# Altium PCB dianyuan.PcbDoc
Units mil, origin at the board's own origin, x right, y up, seen from the top; angles counter-clockwise.
Board outline 3150 x 1970 mil, 2 copper layers (Top Layer, Bottom Layer); 51 components, 21 nets, 149 pads, 228 vias.
Unrouted connection lines stored in the file: 34.
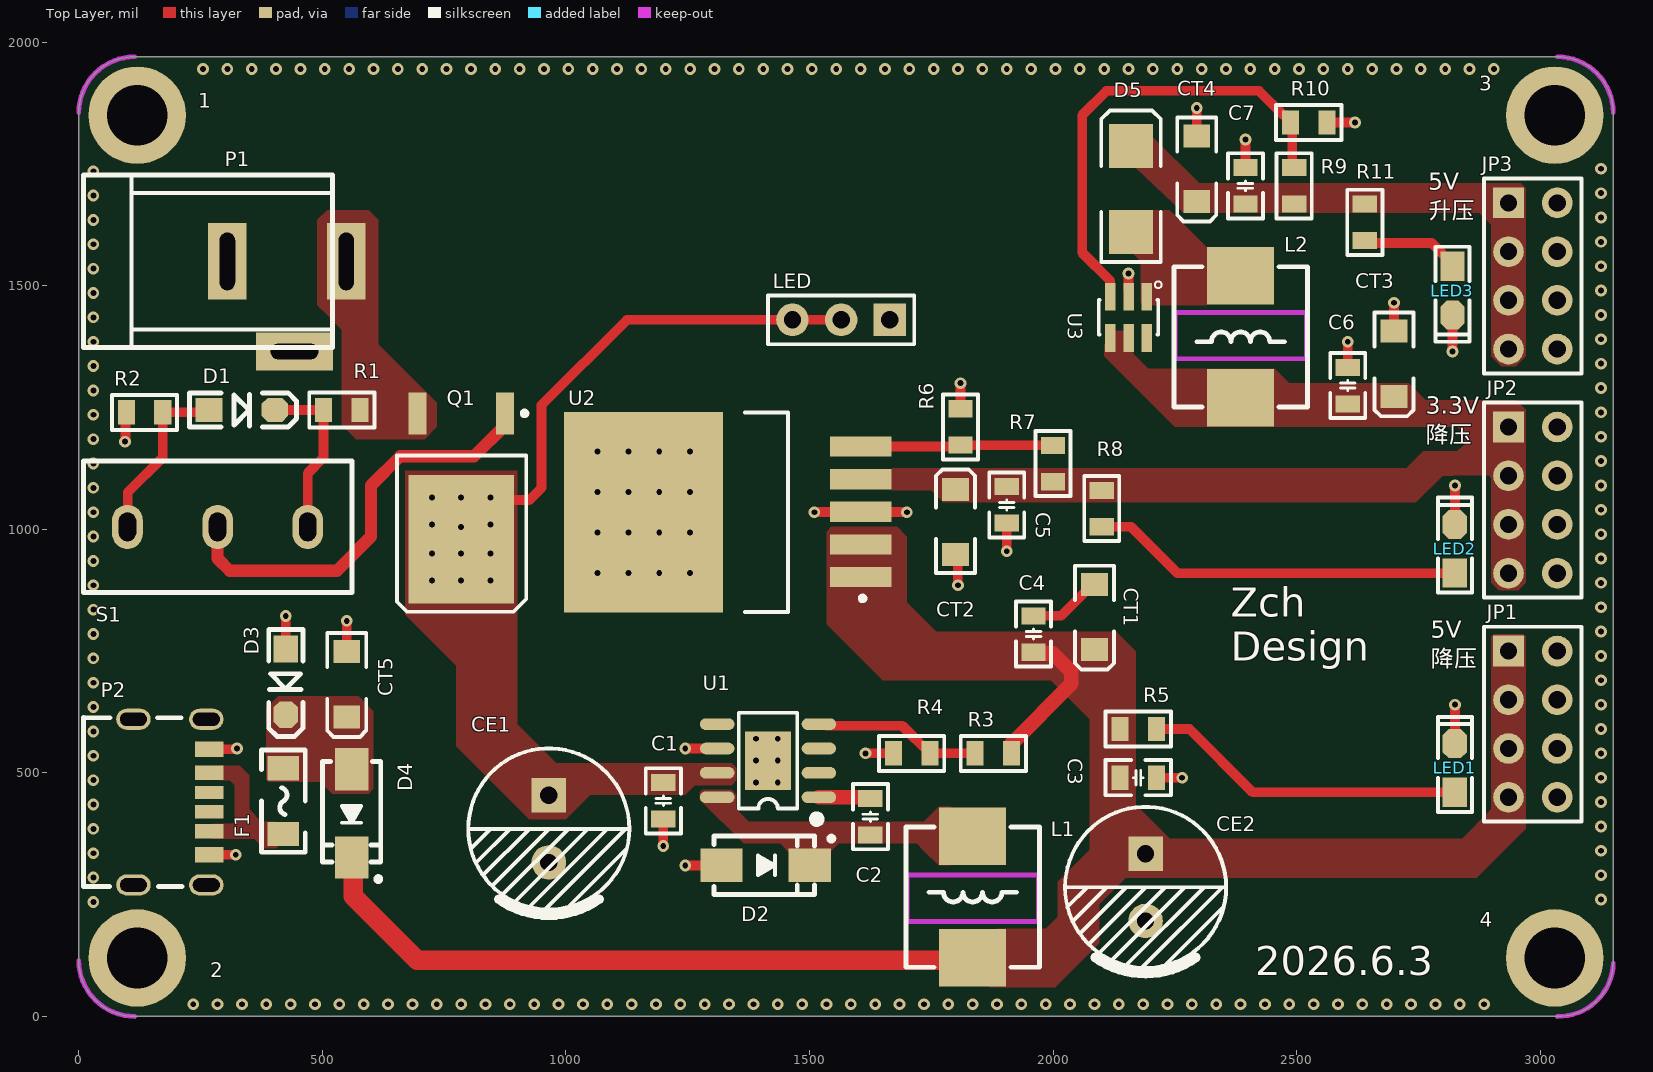
[diagram p0: Top Layer view]
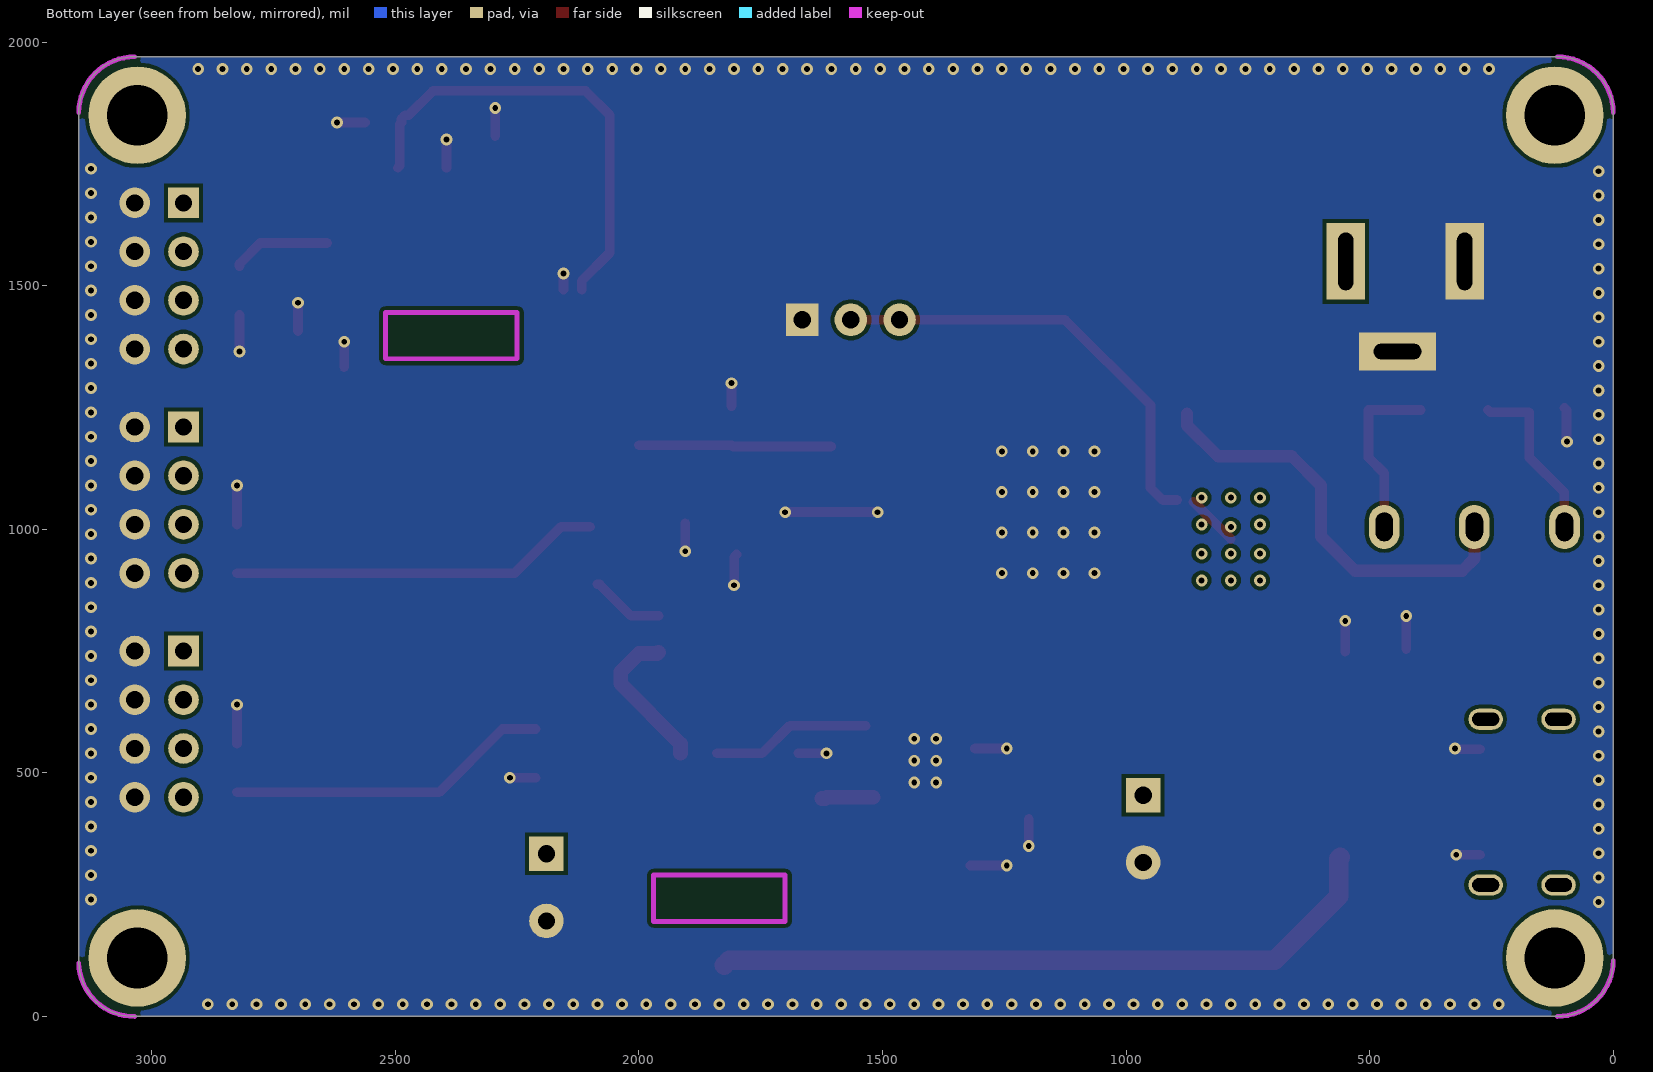
[diagram p1: Bottom Layer view, seen from below]

## Layer stack, top to bottom
Top Solder: solder mask 0.4, Solder Resist, Dk 3.5
Top Layer: signal copper 1.4
Dielectric 1: dielectric 12.6, FR-4, Dk 4.8
Bottom Layer: signal copper 1.4
Bottom Solder: solder mask 0.4, Solder Resist, Dk 3.5

## Board outline
115,0 cw(c115,115) 0,115 0,1855 cw(c115,1855) 115,1970 115,1969.67 3035,1969.67 3035,1970 cw(c3035,1855) 3150,1855 3150,110 cw(c3037.5,112.5) 3035,0
cut-out: -1000,-2967.33 -990,-2967.33 -990,-2957.33 -1000,-2957.33

## Design rules (kind name [scope] priority, off if disabled: settings)
Clearance Clearance_1 [All] p1: gap=8 ignorepadtopadclearanceinfootprint=FALSE except(12: Via-Via)
HoleSize [All] p1: absolutevalues=TRUE maxlimit=200 minlimit=12 maxpercent=80.000 minpercent=20.000
HoleToHoleClearance [All] p1: gap=6 allowstackedmicrovias=TRUE
MinimumSolderMaskSliver MinimumSolderMaskSliver-USB-C [InComponent('P2')] p1: minsoldermaskwidth=2
MinimumSolderMaskSliver [InComponent('U3')] p2: minsoldermaskwidth=4
MinimumSolderMaskSliver MinimumSolderMaskSliver_1 [All] p3: minsoldermaskwidth=10
NetAntennae [All] p1: netantennaetolerance=6
PlaneConnect [All] p1: planeconnectstyle=Direct reliefexpansion=20 reliefentries=4 reliefconductorwidth=10 reliefairgap=10
PolygonConnect [All] p1: connectstyle=Direct reliefconductorwidth=16 reliefentries=4 polygonreliefangle="90 Angle" airgapwidth=10
RoutingVias [All] p1: holewidth=12 width=24 viastyle="Through Hole" minholewidth=12 minwidth=24 maxholewidth=20 maxwidth=40
SilkToSilkClearance [All] p1: silktosilkclearance=6
SilkToSolderMaskClearance SilkToSolderMaskClearance_usb_c [InComponent('P2')] p1: minsilkscreentomaskgap=5 clearancetoexposedcopper=TRUE
SilkToSolderMaskClearance [IsPad] p2: minsilkscreentomaskgap=4 clearancetoexposedcopper=TRUE
SolderMaskExpansion [All] p1: expansion=4 istentingtop=FALSE
Width [All] p1: maxlimit=50 minlimit=10 preferedwidth=20 toplayer_minwidth=20 bottomlayer_maxwidth=10 bottomlayer_prefwidth=10 minimp=50.000000 maximp=50.000000 favimp=50.000000
23 further rules are at their usual default settings.

## Components (designator, comment, footprint, x,y, rotation, side; value= is the part's Value field where it differs from the comment)
1 "M3" "M3 125X200" 120,1850 r90 top
2 "M3" "M3 125X200" 120,120 r90 top
3 "M3" "M3 125X200" 3030,1850 r90 top
4 "M3" "M3 125X200" 3030,120 r90 top
C1 "100nF" "C 0805_L" 1200,442.6 r270 top
C2 "10nF" "C 0805_L" 1625,410 r270 top
C3 "100nF" "C 0805_L" 2175,490 r180 top
C4 "100nF" "C 0805_L" 1960,785 r270 top
C5 "100nF" "C 0805_L" 1905,1050 r90 top
C6 "100nF" "C 0805_L" 2605,1295 r270 top
C7 "100nF" "C 0805_L" 2395,1705 r270 top
CE1 "100uF/16V" "CAP 3.5*8*11.5 - BK" 965,385 r270 top
CE2 "100uF/16V" "CAP 3.5*8*11.5 - BK" 2190,265 r270 top
CT1 "22uF/6.3V" "CD A(3216)" 2085,820 r90 top
CT2 "22uF/6.3V" "CD A(3216)" 1800,1015 r270 top
CT3 "22uF/6.3V" "CD A(3216)" 2700,1340 r90 top
CT4 "22uF/6.3V" "CD A(3216)" 2295,1740 r90 top
CT5 "10uF/6.3V" "CD A(3216)" 550,681.93 r90 top
D1 "BZT52C16" SOD-123 335,1245 r0 top
D2 "SS14" SMA 1410,310 r0 top
D3 "BZT52B5V1" SOD-123 425,686.93 r270 top
D4 "SS14" SMA 560,416.93 r270 top
D5 "SS54" SMB 2160,1698.58 r90 top
F1 "SMD1206-050-16" "FU 1206" 420,441.93 r90 top
JP1 "Header 4X2" HDR2.54-LI-2x4P 2985,600 r270 top
JP2 "Header 4X2" HDR2.54-LI-2x4P 2985,1060 r270 top
JP3 "Header 4X2" HDR2.54-LI-2x4P 2985,1520 r270 top
L1 "22uH" L-SMD-0630 1835,245 r270 top
L2 "4.7uH" L-SMD-0630 2385,1395 r90 top
LED "HDR-1X3" HDR2.54-M-LI-3P 1565,1430 r180 top
LED1 "红色" "LED 0805R" 2825,510 r90 top
LED2 "红色" "LED 0805R" 2825,960 r90 top
LED3 "红色" "LED 0805R" 2820,1490 r270 top
P1 "3.5*1.3" DC-005 305,1550 r180 top
P2 "USB TYPE C 6Pin母座" USB-C-SMD_10P-P1.00-L6.8-W8.9 190,440 r0 top
Q1 "HY19P03D" "TO252 - 3" 785,1064.65 r270 top
R1 "4.7K" "R 0805_L" 540,1245 r180 top
R2 "1K" "R 0805_L" 135,1240 r0 top
R3 "6.8K" "R 0805_L" 1877.4,540 r0 top
R4 "2.2K" "R 0805_L" 1709.8,540 r0 top
R5 "2.2K" "R 0805_L" 2175,590 r180 top
R6 "2K" "R 0805_L" 1810,1210 r270 top
R7 "3.3K" "R 0805_L" 2000,1135 r270 top
R8 "2K" "R 0805_L" 2100,1042.6 r90 top
R9 "110K" "R 0805_L" 2495,1705 r270 top
R10 "15K" "R 0805_L" 2525,1835 r180 top
R11 "2.2K" "R 0805_L" 2640,1630 r90 top
S1 "SS-12F23" SS-12D10 285,1005 r180 top
U1 "TPS5430" SOIC-8_EP 1415,525 r180 top
U2 "SPX29302" TO263-5 1400,1020 r0 top
U3 "MT3608" SOT23-6 2155,1435 r0 top

## Footprints (in the part's own frame and the unit in brackets; to place one, negate y for a bottom-side part, rotate by r counter-clockwise, add the part's x,y. Pads: shape width x height; smd on the part's side, far side on the other; paste and mask are expansions set on the pad)
"C 0805_L" [mil] "无极性贴片电容                                        淘宝ID:黄晶宝石"
  rect 35x50 smd: 1(-37.4,0) 2(37.4,0)
  silkscreen extent -67,-36 67,36, body extent -39,-24 39,24, height 20
"CAP 3.5*8*11.5 - BK" [mm] "脚距3.5mm直径8mm高度11.5mm"
  rect 1.8x1.8 hole 0.9: 1(-1.75,0)
  round 1.8 hole 0.9: 2(1.75,0)
  silkscreen extent -4.2,-4.2 4.5,4.2, body extent -4,-4 4.01,4, height 11.54
"CD A(3216)" [mm] "长3.2mm，宽1.6mm，厚1.6mm      淘宝ID:黄晶宝石"
  rect 1.2x1.4 smd: 1(-1.7,0) 2(1.7,0)
  silkscreen extent -2.74,-1.02 2.67,1.02, body extent -1.6,-0.8 1.6,0.8, height 1.6
DC-005 [mm] "5.5*2.1mm，DC30V,2.5A      淘宝ID:黄晶宝石"
  rect 2x4 hole 0.8 slot 3 at 90 deg: 1(-6.2,0) 2(0,0)
  rect 4x2 hole 0.8 slot 2.5 at 0 deg: 3(-3.5,4.7)
  silkscreen extent -5.48,-4.5 7.5,4.5, body extent -6.55,-4.5 7.5,4.8, height 11.2
"FU 1206" [mil] "贴片保险丝"
  rect 50x65 smd: 1(-67.5,0) 2(67.5,0)
  silkscreen extent -105,-45 105,45, body extent -63,-32 63,32, height 34
HDR2.54-LI-2x4P [mm] "双排排针，4x2脚 淘宝ID:黄晶宝石   店铺网址:https://shop463601444.taobao.com"
  rect 1.6x1.6 hole 0.9: 1(-3.81,-1.27)
  round 1.6 hole 0.9: 2(-3.81,1.27) 3(-1.27,-1.27) 4(-1.27,1.27) 5(1.27,-1.27) 6(1.27,1.27) 7(3.81,-1.27) 8(3.81,1.27)
  silkscreen extent -5.08,-2.54 5.08,2.54, body extent -5.08,-2.54 5.08,2.54, height 8.5
HDR2.54-M-LI-3P [mm] "排母，3脚   淘宝ID:黄晶宝石   店铺网址:https://shop463601444.taobao.com"
  rect 1.7x1.7 hole 0.9: 1(-2.54,0)
  round 1.7 hole 0.9: 2(0,0) 3(2.54,0)
  silkscreen extent -3.81,-1.27 3.81,1.27, body extent -3.81,-1.27 3.81,1.27, height 8.5
L-SMD-0630 [mm] "一体化成型电感"
  rect 3x3.5 smd: 1(-3.175,0) 2(3.175,0)
  silkscreen extent -3.66,-3.48 3.66,3.48, body extent -3.47,-3.3 3.47,3.3, height 3.05
"LED 0805R" [mil] "红色0805LED                                       淘宝ID:黄晶宝石"
  rect 60x50 smd: 1(-50,0)
  oct 60x50 smd: 2(50,0)
  silkscreen extent -90,-35 105,35, body extent -39,-25 39,25, height 32
"M3 125X200" [mil] "M3螺丝孔，孔125Mil，焊盘200Mil"
  round 200 hole 125: 1(0,0)
"R 0805_L" [mil] "1/8W贴片电阻"
  rect 35x50 smd: 1(-37.4,0) 2(37.4,0)
  silkscreen extent -67,-36 67,36, body extent -39,-25 39,25, height 20
SMA [mm] "4.5x2.6*2.2mm（长宽高，不包括引脚）"
  rect 2.2x1.75 smd: 1(-2.3,0) 2(2.3,0)
  silkscreen extent -2.7,-1.52 3.56,1.52, body extent -2.53,-1.3 2.58,1.3, height 2.15
SMB [mm] "DO-214-AA/SMB; 2 C-Bend Leads; Body 5.3 x 3.6 mm, inc. leads (LxW)"
  rect 2.3x2.3 smd: 1(-2.25,0) 2(2.25,0)
  silkscreen extent -3.8,-1.55 4.1,1.55
SOD-123 [mil]
  rect 55x50 smd: 1(-67.5,0)
  oct 55x50 smd: 2(67.5,0)
  silkscreen extent -108,-35 112,35, body extent -73,-31 73,31, height 48
SOIC-8_EP [mm] "5*6*1.8mm（长宽高）封装库来自淘宝卖家 ID：黄晶宝石"
  oval 1.8x0.61 smd: 1(-2.65,1.905) 2(-2.65,0.635) 3(-2.65,-0.635) 4(-2.65,-1.905) 5(2.65,-1.905) 6(2.65,-0.635) 7(2.65,0.635) 8(2.65,1.905)
  rect 2.413x3.048 smd paste-2: 9(0,0)
  rect 0.9x0.7 on Top Paste: 10(-0.625,1.1) 10(-0.625,0) 10(-0.625,-1.1) 11(0.65,1.1) 11(0.65,0) 11(0.65,-1.1)
  silkscreen extent -2.69,-2.5 1.52,3.2, body extent -3,-2.5 3,2.5, height 1.53
SOT23-6 [mm] "SOT-23/SC-74A; 5 Leads; Body 3.1 x 3 mm, inc. leads (LxW max)"
  rect 0.55x1.45 smd: 1(0.95,1.075) 2(0,1.075) 3(-0.95,1.075) 4(-0.95,-1.075) 5(0,-1.075) 6(0.95,-1.075)
  silkscreen extent -1.55,-0.9 1.73,1.88, body extent -1.43,-1.2 1.49,1.14, height 1
SS-12D10 [mm] "脚距3mm      淘宝ID:黄晶宝石"
  oval 1.6x2.3 hole 0.9 slot 1.5 at 90 deg: 1(-4.7,0) 2(0,0) 3(4.7,0)
  silkscreen extent -7,-3.43 7,3.43, body extent -7,-3.1 7,3.1, height 9.65
"TO252 - 3" [mm] "D-PAK  / SOT-428  封装库来自淘宝卖家 ID：黄晶宝石"
  rect 2.2x0.95 smd: 1(-4.4,2.28) 3(-4.4,-2.28)
  rect 6.7x5.5 smd: 2(2.15,0)
  silkscreen extent -4.52,-3.35 5.94,3.43, body extent -4.47,-3.3 4.78,3.3, height 2.31
TO263-5 [mm] "封装库来自淘宝卖家 ID：黄晶宝石"
  rect 3.2x1.05 smd: 1(5.207,-2.997) 2(5.207,-1.297) 3(5.207,0.403) 4(5.207,2.103) 5(5.207,3.803)
  rect 8.3x10.45 smd: 6(-6.117,0.381)
  silkscreen extent -0.83,-4.82 5.43,5.58, body extent -9.54,-4.64 6.13,5.36, height 4.78
USB-C-SMD_10P-P1.00-L6.8-W8.9 [mil]
  oval 70.82x43.31 hole 27.56 slot 55.16 at 0 deg: 0(-77.76,-170.08) 0(-77.76,170.08) 0(71.85,-170.08) 0(71.85,170.08)
  rect 59x27.6 smd: A5(77.76,-19.7) B5(77.76,19.7)
  rect 59x29.9 smd: A9(77.76,59.85) B9(77.76,-59.85)
  rect 59x31.5 smd: A12(77.76,108.25) B12(77.76,-108.25)
  silkscreen extent -180,-174 22,174, body extent -182,-176 85,176, height 127

## Part data
1 2 3 4: "铜柱孔"
C1 C2 C3 C4 C5 C6 C7: library part C, "贴片电容"
CE1 CE2: library part CE, "直插电解电容"
CT1 CT2 CT3 CT4 CT5: library part CT, "贴片钽电容"
D1: library part 稳压二极管, "Zener Diode（齐纳）"
D2 D4 D5: "肖特基二极管"
D3: library part 稳压二极管, "Zener Diode"
F1: library part FU, "自恢复保险丝"
JP1 JP2 JP3: "4*2P接插件"
L1 L2: library part L, "小功率贴片电感"
LED: library part "Header 3", "3P接插件"
LED1 LED2 LED3: library part LED-SMD, "贴片LED"
P1: library part P-DC, "低压电源接口"
Q1: library part IRF540, "P沟场效应管"
R1 R2 R3 R4 R5 R6 R7 R8 R9 R10 R11: library part R, "贴片电阻"
S1: library part SSW-1P, "1路波动开关"
U1: "DC可调降压"
U2: "LDO线性稳压芯片"
U3: "DC升压芯片"

## Via types
v1: diameter 24, hole 12, Top Layer to Bottom Layer, 228 vias

## Nets (pads, with @x,y where several pads share a name; then routed paths per layer and width w, separated by ;. In a path a pad name is that pad's centre, name@x,y a point inside that pad or via, vN(x,y) a via of type N, cw(c..) or ccw(c..) an arc to the next point about the centre after c; other vN are vias at no path point)
3.3V: C5.2 C6.2 CT2.1 CT3.1 JP2.1 JP2.3 JP2.5 JP2.7 L2.1 R7.2 R8.2 U2.4 U3.4 U3.5
+5V: C7.2 CT4.1 D5.2 JP3.1 JP3.3 JP3.5 JP3.7 R9.2 R11.2
GND: C1.2 C3.1 C5.1 C6.1 C7.1 CE1.2 CE2.2 CT2.2 CT3.2 CT4.2 CT5.2 D2.1 D3.1 JP1.2 JP1.4 JP1.6 JP1.8 JP2.2 JP2.4 JP2.6 JP2.8 JP3.2 JP3.4 JP3.6 JP3.8 LED1.2 LED2.2 LED3.2 LED.1 P1.2 P1.3 P2.A12 P2.B12 R2.1 R4.1 R6.1 R10.1 U1.6 U1.9 U2.3 U2.6 U3.2 | length 1518.5
  Top Layer w20: v1(95,1180) 95.77,1180.77 95.77,1244.8 R2.1@100,1249.03 ; P2.B12@272.76,331.75 v1(322.17,331.75) ; P2.A12@272.76,548.25 v1@322.17,548.25 ; D3.1 v1(425,821.93) ; CT5.2 v1(550,811.93) ; v1(1200,350) C1.2 ; v1(1245,310) D2.1 ; v1(1245,550) U1.6 ; v1(1510,1035) 1510.43,1035.43 1604.57,1035.43 U2.3 1605.43,1035.43 1699.57,1035.43 v1(1700,1035) ; v1(1615,540) R4.1 ; CT2.2 1804.23,943.84 1804.23,885.77 v1(1805,885) ; R6.1@1810,1252.41 v1(1810,1300) ; v1(1905,955) C5.1 ; U3.2@2155,1492.32 v1(2155,1525) ; C3.1 v1(2265,490) ; CT4.2 v1(2295,1865) ; C7.1 v1(2395,1800) ; R10.1 v1(2620,1835) ; C6.1 v1(2605,1385) ; CT3.2 v1(2700,1465) ; v1(2820,1365) LED3.2 ; LED1.2 v1(2825,640) ; LED2.2 v1(2825,1090)
  other v1: 235,25 285,25 335,25 385,25 435,25 485,25 535,25 585,25 635,25 685,25 735,25 785,25 835,25 885,25 935,25 985,25 1035,25 1085,25 1135,25 1185,25 1235,25 1285,25 1335,25 1385,25 1435,25 1485,25 1535,25 1585,25 1635,25 1685,25 1735,25 1785,25 1835,25 1885,25 1935,25 1985,25 2035,25 2085,25 2135,25 2185,25 2235,25 2285,25 2335,25 2385,25 2435,25 2485,25 2535,25 2585,25 2635,25 2685,25 2735,25 2785,25 2835,25 2885,25 30,235 3125,240 30,285 3125,290 30,335 3125,340 30,385 3125,390 30,435 3125,440 1390,480 1435,480 30,485 3125,490 1390,525 1435,525 30,535 3125,540 325,550 1390,570 1435,570 30,585 3125,590 30,635 3125,640 30,685 3125,690 30,735 3125,740 30,785 3125,790 30,835 3125,840 30,885 3125,890 1065,910 1128.33,910 1191.67,910 1255,910 30,935 3125,940 30,985 3125,990 1065,993.33 1128.33,993.33 1191.67,993.33 1255,993.33 30,1035 3125,1040 1065,1076.67 1128.33,1076.67 1191.67,1076.67 1255,1076.67 30,1085 3125,1090 30,1135 3125,1140 1065,1160 1128.33,1160 1191.67,1160 1255,1160 30,1185 3125,1190 30,1235 3125,1240 30,1285 3125,1290 30,1335 3125,1340 30,1385 3125,1390 30,1435 3125,1440 30,1485 3125,1490 30,1535 3125,1540 30,1585 3125,1590 30,1635 3125,1640 30,1685 3125,1690 30,1735 3125,1740 255,1945 305,1945 355,1945 405,1945 455,1945 505,1945 555,1945 605,1945 655,1945 705,1945 755,1945 805,1945 855,1945 905,1945 955,1945 1005,1945 1055,1945 1105,1945 1155,1945 1205,1945 1255,1945 1305,1945 1355,1945 1405,1945 1455,1945 1505,1945 1555,1945 1605,1945 1655,1945 1705,1945 1755,1945 1805,1945 1855,1945 1905,1945 1955,1945 2005,1945 2055,1945 2105,1945 2155,1945 2205,1945 2255,1945 2305,1945 2355,1945 2405,1945 2455,1945 2505,1945 2555,1945 2605,1945 2655,1945 2705,1945 2755,1945 2805,1945 2855,1945 2905,1945
NetC2_1: C2.1 U1.1 | length 106.7
  Top Layer w30: U1.1 1614.9,450 1617.5,447.4 C2.1
NetC2_2: C2.2 D2.2 L1.1 U1.8
NetC4_1: C4.1 CT1.2 | length 151.7
  Top Layer w20: C4.1 2016.54,822.4 2081.06,886.93 CT1.2
NetCT5_1: CT5.1 D3.2 D4.1 F1.2
NetD1_1: D1.1 R2.2 S1.3 | length 351.9
  Top Layer w20: S1.3 100.35,1005.39 100.35,1075.35 172.4,1147.4 R2.2 252.2,1240 D1.1@257.2,1245
NetD1_2: D1.2 R1.2 S1.1 | length 361.1
  Top Layer w20: D1.2@395,1245 R1.2 502.6,1147.6 470.04,1115.04 S1.1
NetD5_1: D5.1 L2.2 U3.1
NetLED1_1: LED1.1 R5.1 | length 666.4
  Top Layer w20: R5.1 2280,590 2410,460 LED1.1
NetLED2_1: LED2.1 R8.1 | length 764.4
  Top Layer w20: R8.1 2159.8,1005.2 2255,910 LED2.1
NetLED3_1: LED3.1 R11.1 | length 202.6
  Top Layer w20: R11.1@2640,1587.6 2777.4,1587.6 2820,1545 LED3.1
NetP1_1: P1.1 Q1.3 R1.1
NetQ1_1: Q1.1 S1.2 | length 874.8
  Top Layer w25: S1.2 285,940 310,915 530,915 600,985 600,1090 660,1150 811.5,1150 874.76,1213.27 Q1.1
NetR3_1: R3.1 R4.2 U1.4 | length 328.6
  Top Layer w20: U1.4@1534.92,596.69 1690.51,596.69 R4.2 R3.1
NetR6_2: R6.2 R7.1 U2.5 | length 395.6
  Top Layer w20: U2.5@1605.28,1170 1807.4,1170 R6.2 ; R6.2@1810.19,1172.4 R7.1
NetR9_1: R9.1 R10.2 U3.3 | length 956.8
  Top Layer w20: U3.3@2117.6,1492.32 2117.6,1510.04 2060,1567.64 2060,1850 2110,1900 2422.6,1900 2472.6,1850 2480.1,1850 2487.6,1842.5 R10.2 2491.3,1831.31 2491.3,1746.1 R9.1
TYPE-C_5V: F1.1 P2.A9 P2.B9
VBAT+: C1.1 CE1.1 LED.2 LED.3 Q1.2 U1.7 | length 1031.1
  Top Layer w20: Q1.2 Q1.2@861.55,1056.55 ; 895,1060 925,1060 950,1085 950,1255 1125,1430 LED.3 LED.2
  other v1: 725,895 785,895 845,895 725,950 785,950 845,950 785,1005 725,1010 845,1010 725,1065 785,1065 845,1065
VCC5V: C3.2 C4.2 CE2.1 CT1.1 D4.2 JP1.1 JP1.3 JP1.5 JP1.7 L1.2 R3.2 R5.2 U2.1 U2.2 | length 1713.9
  Top Layer w30: R3.2 1914.8,559.8 2037.57,682.57 2037.57,707.43 1999.9,745.1 1962.5,745.1 C4.2
  Top Layer w40: D4.2 563.12,323.26 563.12,246.88 695,115 1815,115 L1.2@1825,105
pads on no net: 1.1 2.1 3.1 4.1 P2.0 P2.A5 P2.B5 U1.2 U1.3 U1.5 U1.10 U1.11 U3.6

## Polygon pours and split planes (outlines as drawn)
3.3V on Top Layer "3.3V_L01_P065" (solid, pour order 65): 1670,1080 1750,1080 1775,1055 2745,1055 2800,1110 2895,1110 2900,1105 2900,890 2915,875 2955,875 2970,890 2970,1245 2950,1265 2765,1265 2730,1300 2485,1300 2455,1330 2195,1330 2165,1360 2165,1397.68 2155,1407.68 2112.68,1407.68 2110,1405 2110,1385 2105,1380 2105,1355 2250,1210 2830,1210 2845,1195 2845,1175 2830,1160 2760,1160 2725,1125 1670,1125 1665,1120 1660,1120 1660,1090
NetC2_2 on Top Layer "NETC2_2_L01_P075" (solid, pour order 75): 1340,465 1350,455 1350,425 1375,400 1735,400 1765,430 1790,430 1800,420 1800,320 1790,310 1765,310 1740,335 1735,340 1735.05,340 1720.05,355 1555,355 1530,330 1555,355 1560,355 1545,340 1540,335 1460,335 1440,355 1365,355 1275,445 1275,460 1280,465
VBAT+ on Top Layer "VBAT+_L01_P003" (solid, remove dead copper, pour order 3): 670,1120 900,1120 900,600 980,520 1340,520 1350,510 1350,485 1340,475 1265,475 1245,455 1050,455 1000,405 925,405 775,555 775,720 670,825
VCC5V on Top Layer "VCC5V_L01_P045" (solid, pour order 45): 2240,365 2840,365 2900,425 2900,780 2905,785 2965,785 2970,780 2970,385 2870,285 2225,285 2225,355 2230,360
VCC5V on Top Layer "VCC5V_L01_P059" (solid, pour order 59): 2005,60 2095,150 2095,230 2152.5,287.5 2086.75,353.25 2010,276.49 2010,205 1985,180 1885,180 1865,160 1865,65 1870,60
NetP1_1 on Top Layer "NETP1_1_L01_P000" (solid, pour order 0): 490,1635 510,1655 595,1655 615,1635 615,1380 735,1260 735,1210 710,1185 570,1185 540,1215 540,1410 510,1440 490,1460
NetD5_1 on Top Layer "NETD5_1_L01_P062" (solid, pour order 62): 2320,1465 2315,1460 2185,1460 2180,1465 2180,1550 2140,1590 2205,1655 2240,1655 2320,1575
+5V on Top Layer "+5V_L01_P061" (solid, pour order 61): 2267.37,1650 2875,1650 2900,1625 2900,1355 2920,1335 2950,1335 2970,1355 2970,1700 2960,1710 2300,1710 2205,1805 2170,1770 2170,1742.5
TYPE-C_5V on Top Layer "TYPE-C_5V_L01_P058" (solid, pour order 58): 415,355 405,345 380,345 360,365 275,365 270,370 270,390 275,395 315,395 320,400 320,475 310,485 290,485 285,490 285,510 290,515 330,515 350,495 350,425 375,400 405,400 415,390
NetCT5_1 on Top Layer "NETCT5_1_L01_P022" (solid, pour order 22): 454.81,481.88 495.05,481.88 520,456.93 595,456.93 605,466.93 605,626.93 575,656.93 410,656.93 385,631.93 385,486.93 390,481.93
VCC5V on Top Layer "VCC5V_L01_P016" (solid, pour order 16): 1535,995 1545,1005 1680,1005 1700,985 1700,850 1760,790 2130,790 2170,750 2170,435 2240,365 2240,300 2225,285 2131.49,285 2075,341.49 2075,610 1995,690 1650,690 1535,805
GND on Bottom Layer "GND_L02_P053" (solid, pour order 53): 0,0 0,1969.67 3150,1969.67 3150,0

## Keep-outs
Keep-Out Layer:
  pour cut-out: 2250,1347.5 2250,1442.5 2520,1442.5 2520,1347.5
  lines w10: 0,115 ccw(c115,115) 115,0 ; 0,1855 cw(c115,1855) 115,1970 ; 3035,0 ccw(c3037.5,112.5) 3150,110 ; 3035,1970 cw(c3035,1855) 3150,1855 ; 1700,195 1700,290 1970,290 1970,195 1700,195 ; 2250,1350 2250,1445 2520,1445 2520,1350 2250,1350

## Other copper
Top Layer:
  pour cut-out: 1700,195 1700,290 1970,290 1970,195
Bottom Layer:
  pour cut-out: 1700,195 1970,195 1970,290 1700,290

## Silkscreen, mask and mechanical layers (free items; w line width, h text height)
Top Overlay:
  text "5V / 升压" at 2770,1625 h60
  text "3.3V / 降压" at 2765,1165 h60
  text "Zch / Design" at 2365,730 h60
  text "5V / 降压" at 2775,705 h60
  text "2026.6.3" at 2415,85 h60
Mechanical 1:
  lines w10: 0,115 0,1855 ; 115,0 3035,0 ; 115,1969.67 3035,1969.67 ; 3150,110 3150,1855